# Altium PCB 400432.PcbDoc (part 6 of 7)
Units mm, origin at the board's own origin, x right, y up, seen from the top; angles counter-clockwise.
Board outline 136.53 x 63.5 mm, 4 copper layers (Top Layer, Mid-Layer 1, Mid-Layer 2, Bottom Layer), stack 1.505 mm thick; 354 components, 245 nets, 1470 pads, 1957 vias.
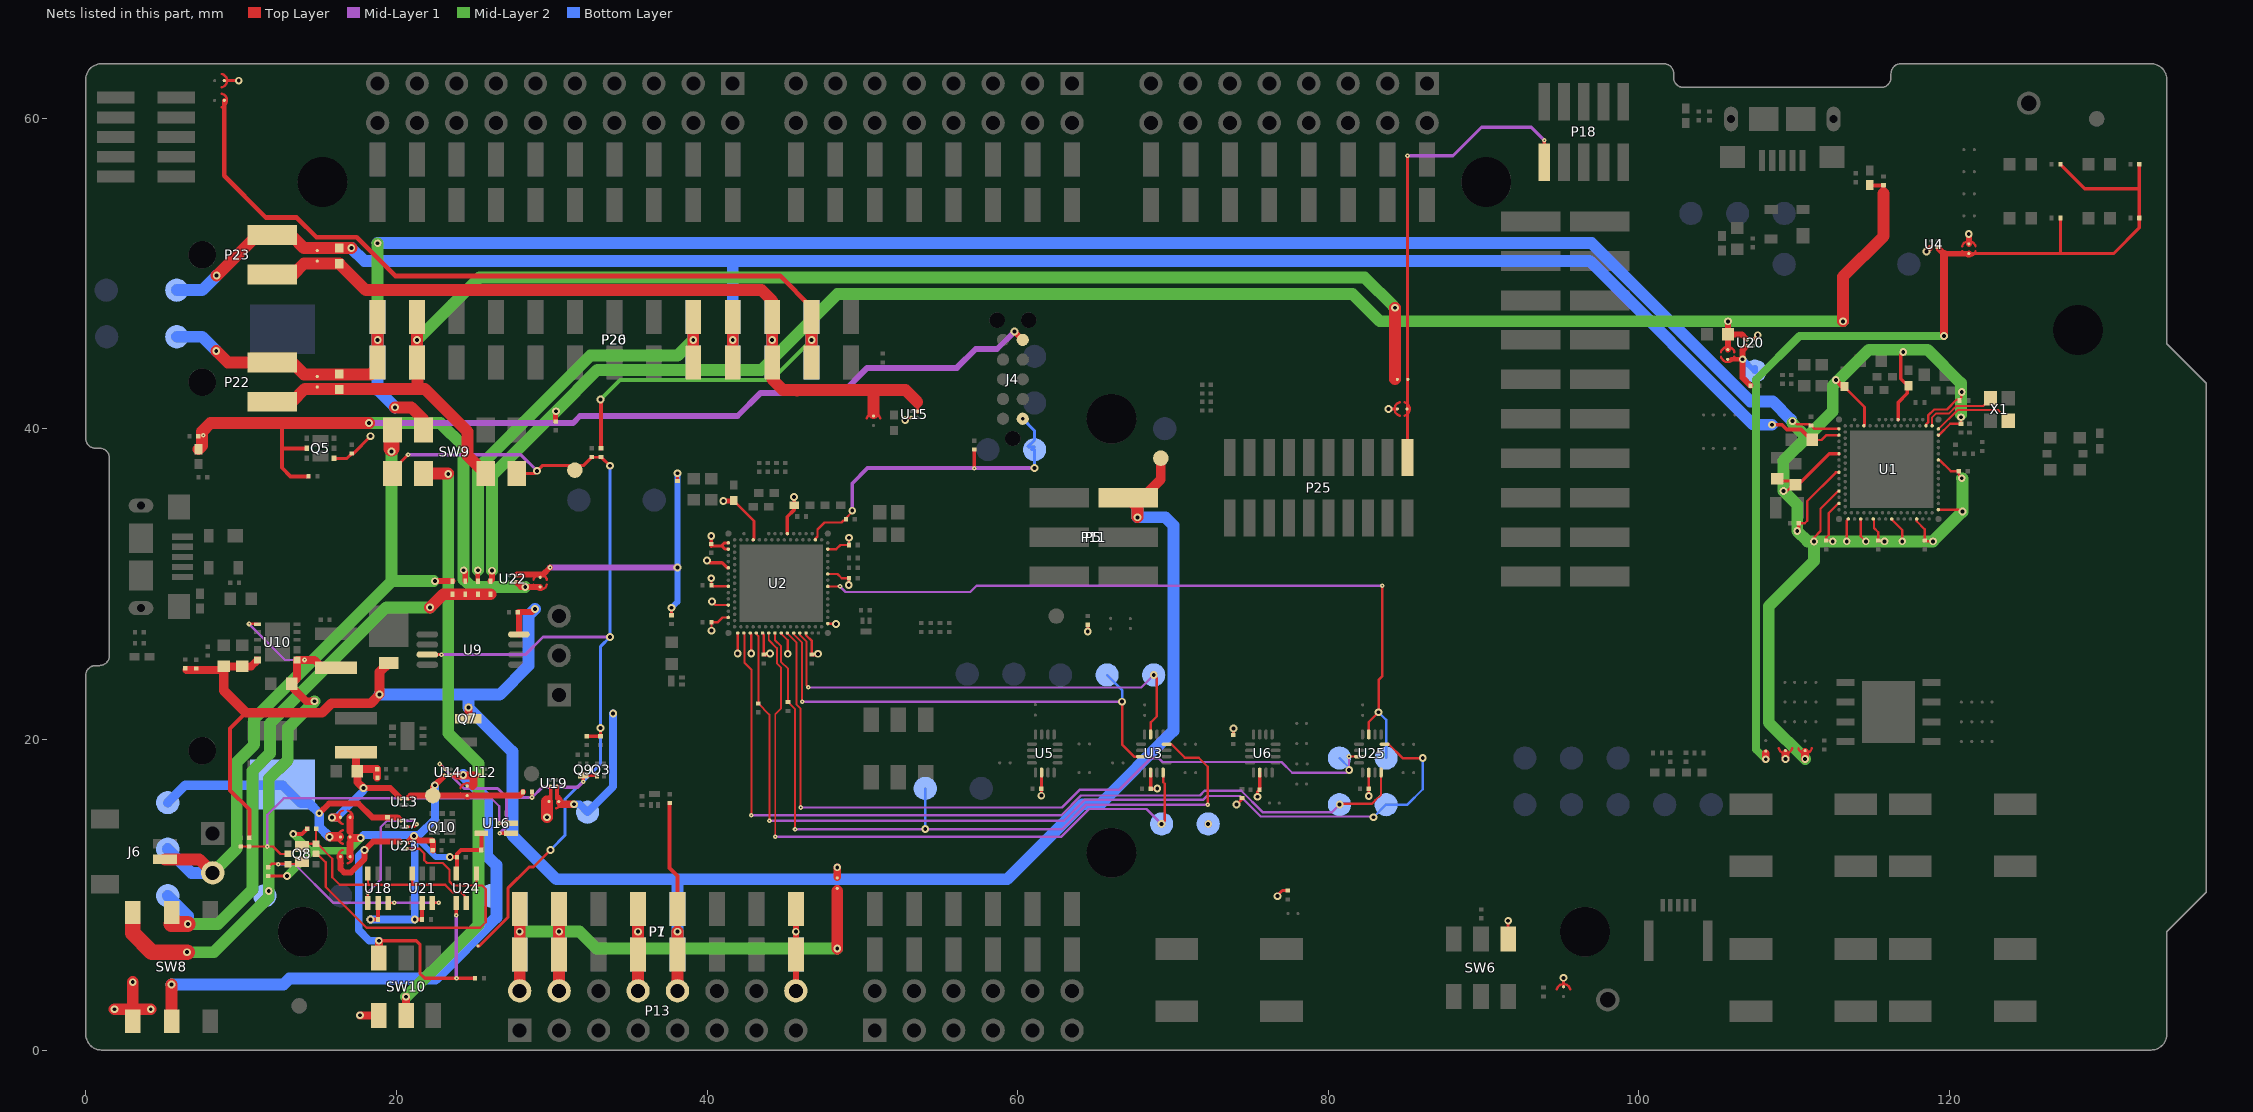
[diagram p7: the nets of this part, all layers, seen from the top]

## Via types
v1: diameter 0.5, hole 0.25, Top Layer to Bottom Layer, tented both sides, 1453 vias
v2: diameter 0.3, hole 0.1, Top Layer to Mid-Layer 1, tented top, 392 vias
v3: diameter 0.3, hole 0.1, Top Layer to Mid-Layer 1, tented both sides, 68 vias
v4: diameter 0.61, hole 0.305, Top Layer to Bottom Layer, tented both sides, 44 vias

## Nets (pads, with @x,y where several pads share a name; then routed paths per layer and width w, separated by ;. In a path a pad name is that pad's centre, name@x,y a point inside that pad or via, vN(x,y) a via of type N, cw(c..) or ccw(c..) an arc to the next point about the centre after c; other vN are vias at no path point) (continued)
V5V: C58.2 C59.2 C60.2 C65.2 D4.1 P1.5 P5.2 P7.5 P11.2 P13.10 Q7.2 R58.1 R59.2 R65.1 TP36.1 U9.8 U10.10 | length 143.5
  Top Layer w0.254: 10.312,21.717 9.296,20.701 9.296,16.713 10.538,15.472 R65.1@10.538,13.671 ; R58.1@37.592,15.895 37.592,11.709 38.1,11.201 v1(38.1,7.62)
  Top Layer w0.381: C65.2@27.856,28.194 28.727,28.194 v1(28.931,28.397) ; U9.8@27.893,26.756 C65.2@27.893,28.157
  Top Layer w0.508: C58.2@6.477,24.473 C60.2@8.663,24.473 ; C60.2@8.89,24.7 C59.2@10.084,24.7 10.66,24.7 U10.10@11.04,25.079 ; Q7.2@24.639,21.336 v1(24.639,22.046)
  Top Layer w0.635: C60.2@8.89,24.7 8.89,23.139 10.312,21.717 15.215,21.717 15.824,22.327 18.364,22.327 v1(18.923,22.885) 18.923,24.334 D4.1@19.507,24.918 ; P5.2@67.119,35.56 68.047,35.56 69.215,36.728 TP36.1@69.215,38.1
  Top Layer w0.762: P13.10@38.1,3.81 P1.5@38.1,6.155 v1(38.1,7.62) ; P5.2@67.119,35.56 67.722,34.957 v1(67.722,34.296)
  Bottom Layer w0.508: 21.857,22.948 21.92,22.885 ; 24.639,22.81 24.714,22.885
  Bottom Layer w0.762: v1(18.923,22.885) 21.92,22.885 24.714,22.885 26.645,22.885 28.499,24.74 28.499,27.965 v1(28.931,28.397) ; 24.639,22.81 v1(24.639,22.046) 27.47,19.215 27.47,13.83 30.302,10.998 38.1,10.998 ; P7.5@38.1,6.155 v1(38.1,7.62) P7.5@38.1,9.085 38.1,10.998 ; P11.2@67.722,35.56 v1(67.722,34.296) 69.514,34.296 70.028,33.782 70.028,20.549 65.303,15.824 64.16,15.824 59.334,10.998 38.1,10.998
VBAT: Bat1.1 R71.1 SB35.2 TP26.1 U17.A1 | length 19.3
  Top Layer w0.381: v1(15.037,15.24) 15.672,15.875 17.551,15.875 18.448,14.978 20.087,14.978 U17.A1@20.225,14.84
  Top Layer w0.61: v1(15.697,13.716) SB35.2@16.332,13.716
  Bottom Layer w0.61: TP26.1@5.283,15.932 6.402,17.05 12.675,17.05 13.85,15.875 14.402,15.875 v1(15.037,15.24) 15.037,14.376 v1(15.697,13.716)
VBAT_EN: U17.B2 U18.4 | length 8.5
  Top Layer w0.152: v2(18.161,10.135) 18.161,9.474 U18.4@18.171,9.464 ; U17.B2@20.698,14.367 21.149,14.367 v2(21.311,14.529)
  Mid-Layer 1 w0.152: v2(18.161,10.135) 18.999,10.973 18.999,14.351 19.406,14.757 21.082,14.757 v2(21.311,14.529)
VBOOST_SRC: C57.2 L7.2 SW8.6 TP28.1 U10.1 U10.6 | length 36.4
  Top Layer w0.152: v2(10.516,27.432) 11.056,27.432 U10.6@11.074,27.414
  Top Layer w0.508: v1(14.732,22.454) 14.199,22.454 13.273,23.379 C57.2@13.273,23.571 13.614,23.912 U10.1@13.614,25.114 v2(14.09,25.114) 14.739,25.114 15.291,24.562 L7.2@15.832,24.562
  Top Layer w1.016: 3.028,8.109 3.028,7.529 4.258,6.299 v1(6.518,6.299)
  Mid-Layer 1 w0.152: v2(10.516,27.432) 12.834,25.114 v2(14.09,25.114)
  Mid-Layer 2 w0.762: v1(6.518,6.299) 8.255,6.299 11.786,9.83 v1(11.786,10.236) 11.786,17.45 13.005,18.669 13.005,20.726 v1(14.732,22.454)
VBOOST_SRC': D3.1 D5.1 D6.1 D7.1 SW8.5 TP32.1 | length 37.3
  Top Layer w0.762: v1(22.173,28.5) 23.019,29.346 D6.1@23.622,29.346 D3.1@24.435,29.346 D7.1@25.248,29.346 D5.1@26.06,29.346
  Top Layer w1.016: 5.528,8.109 v1(6.576,8.109)
  Mid-Layer 2 w0.762: v1(6.576,8.109) 8.516,8.109 10.744,10.338 10.744,17.983 11.862,19.101 11.862,21.006 19.356,28.5 v1(22.173,28.5)
  Bottom Layer w0.762: TP32.1@5.283,9.931 6.576,8.639 v1(6.576,8.109)
VBUS: C50.2 D3.2 FB2.2 J4.5 Q5.2 R52.1 SB48.2 U22.A2 | length 85.1
  Top Layer w0.254: 12.675,40.361 12.624,40.31 12.624,38.735 ; Q5.2@14.168,38.735 12.624,38.735 ; R52.1@14.345,36.932 13.183,36.932 12.624,37.49 12.624,38.735
  Top Layer w0.381: v1(24.333,30.886) 24.435,30.785 D3.2@24.435,30.186 ; 27.788,30.062 27.774,30.062 28.024,29.812 v1(28.296,29.812) SB48.2@29.235,29.812 ; v1(59.792,46.253) J4.5@60.325,45.72
  Top Layer w0.762: FB2.2@7.264,38.677 7.493,38.905 7.493,39.821 8.032,40.361 12.675,40.361 v1(18.237,40.361)
  Mid-Layer 1 w0.381: v1(18.237,40.361) 31.369,40.361 31.826,40.818 41.961,40.818 43.434,42.291 48.692,42.291 50.317,43.917 56.083,43.917 57.302,45.136 58.674,45.136 v1(59.792,46.253)
  Mid-Layer 2 w0.762: v1(18.237,40.361) 22.835,40.361 24.333,38.862 v1(24.333,30.886) 24.333,30.302 24.823,29.812 v1(28.296,29.812)
  other v2: 7.569,39.573
VBUS_IMCU: R7.2 R10.1 SB48.1 U22.A1 | length 20.3
  Top Layer w0.203: R7.2@37.719,27.996 v1(37.719,28.473) ; R10.1@38.1,36.632 v1(38.1,37.135)
  Top Layer w0.381: U22.A1@27.762,30.604 29.179,30.604 29.342,30.604 29.435,30.604 v3(29.896,31.064)
  Mid-Layer 1 w0.381: v3(29.896,31.064) v1(38.1,31.064)
  Bottom Layer w0.381: v1(37.719,28.473) 38.1,28.854 v1(38.1,31.064) v1(38.1,37.135)
VBUS_NRF: R1.1 SB80.1 TP38.1 U20.A1 | length 4.9
  Top Layer w0.305: 105.943,44.468 106.068,44.468 v1@106.676,44.468
  Top Layer w0.381: U20.A1@106.909,45.288 106.676,45.056 v1(106.676,44.472) 106.676,44.468 106.676,43.28 R1.1@107.182,42.774
  Bottom Layer w0.381: v1(106.676,44.472) 107.434,43.713 TP38.1@107.467,43.713 TP38.1@107.467,43.909
VBUS_NRF': C48.2 C67.2 D5.2 FB1.2 R78.1 SB80.2 U20.A2 | length 113.8
  Top Layer w0.254: FB1.2@114.852,55.684 114.864,55.671 C48.2@115.748,55.671 115.748,55.143
  Top Layer w0.305: R78.1@30.251,40.513 v1@30.251,41.097
  Top Layer w0.381: D5.2@26.06,30.186 26.162,30.287 v1(26.162,30.861) ; SB80.2@105.715,45.093 105.729,45.107 105.729,45.237 105.729,45.267 C67.2@105.729,46.076 ; v1(105.74,46.914) 105.729,46.903 C67.2@105.729,46.076 ; U20.A2@106.896,45.809 106.64,46.065 105.74,46.065 C67.2@105.729,46.076
  Top Layer w0.762: v1(113.132,46.914) 113.132,49.784 115.748,52.4 115.748,55.143
  Mid-Layer 2 w0.762: v1(26.162,30.861) 26.162,37.008 30.251,41.097 32.944,43.79 43.51,43.79 48.387,48.666 81.559,48.666 83.312,46.914 v1(105.74,46.914) v1(113.132,46.914)
  other v1: 30.277,41.123
VCOM0_CTS: R9.1 TP55.1 U2.AL9 U25.4 | length 61.3
  Top Layer w0.125: U2.AL9@43.176,26.848 43.195,26.829 43.195,26.758 43.301,26.652 R9.1@43.301,22.311 44.018,21.593 v3(44.018,14.757)
  Top Layer w0.152: U25.4@83.629,19.691 83.89,19.691 84.785,18.796 v1(86.081,18.796)
  Mid-Layer 1 w0.152: v3(44.018,14.757) 62.967,14.757 64.313,16.104 71.933,16.104 72.187,16.358 74.33,16.358 75.651,15.037 82.855,15.037 v1(82.906,14.986)
  Bottom Layer w0.152: v1(82.906,14.986) TP55.1@83.718,15.799 85.09,15.799 86.081,16.789 v1(86.081,18.796)
VCOM0_RTS: TP54.1 U2.AL5 U25.16 | length 55.6
  Top Layer w0.125: U2.AL5@42.376,26.848 42.414,26.811 42.414,24.936 42.851,24.499 v3@42.851,15.114 ; 83.033,16.078 83.404,16.45 U25.16@83.404,17.866
  Top Layer w0.152: v1(80.732,15.799) 80.783,15.85 82.804,15.85 83.033,16.078 ; U25.16@83.404,17.866 U25.16@83.409,17.861
  Mid-Layer 1 w0.152: v3(42.85,15.113) 62.814,15.113 64.084,16.383 71.73,16.383 72.034,16.688 74.397,16.688 75.768,15.316 80.25,15.316 v1(80.732,15.799)
  Bottom Layer w0.152: TP54.1@80.718,15.799 v1(80.732,15.799)
VCOM0_RxD: TP57.1 U2.AL19 U25.11 | length 51.2
  Top Layer w0.125: U2.AL19@45.176,26.806 45.193,26.806 45.771,26.228 45.771,22.232 46.032,21.971 v3(46.032,15.614)
  Top Layer w0.15: U2.AL19@45.176,26.806 U2.AL19@45.176,26.848
  Top Layer w0.152: v2(81.331,18.898) 81.334,18.894 81.976,18.894 U25.11@81.979,18.891
  Mid-Layer 1 w0.152: v3(46.032,15.614) 62.408,15.614 62.858,15.614 64.008,16.764 66.548,16.764 68.58,18.796 69.063,18.796 69.317,18.542 76.987,18.542 77.673,17.856 81.166,17.856 v1(81.343,18.034) 81.331,18.034 v2(81.331,18.898)
  Bottom Layer w0.152: TP57.1@80.718,18.799 81.343,18.173 v1(81.343,18.034)
VCOM0_TxD: TP56.1 U2.U31 U25.7 | length 49.1
  Top Layer w0.125: U2.U31@47.795,29.829 U2.U31@47.776,29.848 v3(48.562,29.848)
  Top Layer w0.152: U25.7@82.604,20.316 82.604,21.111 v1(83.236,21.742) 83.236,23.825 83.464,24.054 v3(83.464,29.896)
  Mid-Layer 1 w0.152: v3(48.562,29.848) 48.92,29.489 56.947,29.489 57.353,29.896 v3(83.464,29.896)
  Bottom Layer w0.152: v1(83.236,21.742) 83.718,21.26 TP56.1@83.718,18.799
VCOM2_CTS: R13.1 TP1.1 U2.AL15 U3.4 | length 48.7
  Top Layer w0.125: U2.AL15@44.376,26.848 44.376,26.398 44.751,26.023 44.751,25.002 45.216,24.537 R13.1@45.216,22.398 45.669,21.945 v3(45.669,14.224)
  Top Layer w0.152: U3.4@69.597,19.685 U3.4@69.591,19.691 69.895,19.691 70.764,18.821 71.653,18.821 72.238,18.237 v3(72.238,15.799)
  Mid-Layer 1 w0.152: v3(45.669,14.224) v1(54.051,14.224) 62.865,14.224 64.44,15.799 v3(72.238,15.799)
  Bottom Layer w0.152: v1(54.051,14.224) TP1.1@54.051,16.84
VCOM2_RTS: TP3.1 U2.AL13 U3.16 | length 43
  Top Layer w0.125: U2.AL13@43.976,26.848 43.976,26.398 44.501,25.873 44.501,24.898 44.774,24.625 44.774,21.996 44.393,21.615 v3@44.393,13.741
  Top Layer w0.152: v1(69.266,14.554) 69.469,14.757 69.469,17.145 69.366,17.248 U3.16@69.366,17.866
  Mid-Layer 1 w0.152: v3@44.399,13.741 62.814,13.741 64.592,15.519 68.301,15.519 v1(69.266,14.554)
  other v3: 44.399,13.741
VCOM2_RxD: TP2.1 U2.AL21 U3.11 | length 31.6
  Top Layer w0.125: U2.AL21@45.576,26.824 45.576,26.777 45.627,26.727 46.126,26.227 v3(46.126,22.428)
  Top Layer w0.152: v1(66.726,22.428) 66.726,19.66 67.494,18.891 U3.11@67.941,18.891
  Mid-Layer 1 w0.152: v3(46.126,22.428) v1(66.726,22.428)
  Bottom Layer w0.152: TP2.1@65.758,24.144 66.726,23.176 v1(66.726,22.428)
VCOM2_TxD: TP4.1 U2.AL23 U3.7 | length 30.4
  Top Layer w0.125: U2.AL23@45.976,26.848 45.995,26.829 45.995,26.712 46.401,26.306 46.401,23.474 v3(46.528,23.347)
  Top Layer w0.152: U3.7@68.566,20.316 68.58,20.33 68.58,21.107 68.961,21.488 68.961,23.927 v1@68.758,24.13
  Mid-Layer 1 w0.152: v3(46.528,23.347) 46.533,23.343 67.956,23.343 v1(68.758,24.144)
  Bottom Layer w0.152: TP4.1@68.758,24.13 v1(68.758,24.144)
VDBG: P18.1 P25.1 SB59.1 SB60.1 | length 30.8
  Top Layer w0.203: P25.1@85.09,38.145 85.098,38.153 v2(85.098,57.574) ; P18.1@93.904,57.156 v2(93.904,58.572)
  Mid-Layer 1 w0.203: v2(85.098,57.574) 88.029,57.574 89.865,59.411 93.066,59.411 v2(93.904,58.572)
VDD: C24.2 C41.2 C42.2 C45.2 Q5.4 R47.2 R48.1 R49.1 R51.1 R57.2 SB9.1 SB17.1 SB31.1 SB37.2 SB38.2 SB47.1 SB59.2 SW6.6 SW8.3 SW10.6 TP37.1 U3.14 U4.A2 U5.14 U6.14 U15.B2 U19.A2 U20.B2 U25.14 | length 24.6
  Top Layer w0.152: v1(82.601,16.358) 82.606,16.363 C24.2@82.606,16.815 82.606,17.864 U25.14@82.604,17.866
  Top Layer w0.2: SB47.1@8.923,62.408 v1(9.855,62.408) ; Q5.4@16.058,38.085 16.805,38.085 R51.1@17.12,38.399 17.216,38.399 v1(18.339,39.522) ; v1(61.524,16.377) C42.2@61.524,16.815 61.547,16.838 U5.14@61.547,17.866 ; v1(64.516,26.949) R57.2@64.516,27.376 ; U3.14@68.566,17.866 68.566,16.817 C41.2@68.569,16.815 68.986,16.815 v1(68.986,16.84) ; R48.1@73.889,20.275 v1(73.889,20.701) ; v1(74.092,15.799) 74.447,16.154 R49.1@74.447,16.225 ; v1(75.435,16.31) 75.435,16.614 75.585,16.764 U6.14@75.585,17.866 ; v1(83.871,41.275) SB59.2@84.442,41.275 ; SB31.1@95.148,4.072 v1(95.148,4.648)
  Top Layer w0.203: v1(52.756,40.564) 52.911,40.719 U15.B2@53.14,40.719 ; v1@76.733,9.957 77.044,10.267 R47.2@77.394,10.267 ; SW6.6@91.579,7.14 v1(91.579,8.319) ; U20.B2@107.363,45.742 v1(107.645,46.025)
  Top Layer w0.254: 29.941,15.992 U19.A2@29.941,16.95
  Top Layer w0.381: v1(118.516,51.41) U4.A2@118.732,51.625 ; SB9.1@121.234,51.9 v1(121.234,52.529)
  Top Layer w0.508: v1(17.653,2.235) 17.674,2.214 SW10.6@18.875,2.214 ; SB38.2@48.387,11.125 v1(48.387,11.76) ; v1(109.431,18.738) 109.431,19.096
  Top Layer w0.762: v1(1.848,2.628) v1(4.185,2.628) ; SW8.3@3.027,2.559 v1(3.027,4.369) ; 29.679,15.992 29.693,15.979 v1(29.693,14.986)
  Bottom Layer w0.508: v1(72.263,14.554) TP37.1@72.266,14.554
  other v1: 76.733,9.906
VDD_HV: C20.1 P20.10 P23.1 P26.10 R67.2 SB41.1 TP25.1 U1.E1 | length 125.2
  Top Layer w0.158: C20.1@111.369,39.272 111.761,39.272 ; C20.1@111.369,39.272 111.353,39.289 C20.1@111.369,39.272 ; C20.1@111.369,39.272 111.761,39.272 ; 111.761,39.272 112.078,39.589 ; 111.761,39.272 112.078,39.589 ; 112.078,39.589 U1.E1@112.878,39.589 112.078,39.589
  Top Layer w0.25: v1(108.56,40.259) 109.195,40.259 109.515,39.939 110.429,39.939 111.079,39.289 111.353,39.289 C20.1@111.308,39.289
  Top Layer w0.762: v1(8.43,49.86) 10.97,52.4 13.284,52.4 14.054,51.63 R67.2@16.332,51.63 v1(17.102,51.63) ; P20.10@41.656,44.255 v1(41.656,45.72) P20.10@41.656,47.185
  Bottom Layer w0.762: TP25.1@5.867,48.923 7.493,48.923 v1(8.43,49.86) ; v1(17.102,51.63) 17.932,50.8 41.656,50.8 ; P26.10@41.656,44.255 v1(41.656,45.72) P26.10@41.656,47.185 41.656,50.8 ; v1(108.56,40.259) 107.366,40.259 96.825,50.8 41.656,50.8
VDD_HV': P20.11 P23.2 P26.11 R67.1 SB41.2 SB81.1 U15.A1 | length 53.8
  Top Layer w0.254: U15.A1@53.54,41.119 53.54,41.729
  Top Layer w0.762: P23.2@11.811,49.86 13.284,49.86 14.064,50.64 16.322,50.64 R67.1@16.332,50.63 18.042,48.92 43.51,48.92 44.196,48.235 P20.11@44.196,47.185 v1(44.196,45.72) P20.11@44.196,44.255 44.196,43.18 44.882,42.494 45.771,42.494 ; 45.796,42.469 45.771,42.494 ; 50.724,41 50.724,42.494 ; 53.54,41.729 52.775,42.494 50.724,42.494 ; 45.771,42.494 50.724,42.494
  Bottom Layer w0.762: P26.11@44.196,44.255 v1(44.196,45.72) P26.11@44.196,47.185
VDD_IMCU: C25.1 C30.1 C31.1 C32.1 C33.1 C34.1 C35.1 C36.1 C37.1 C38.2 J4.1 R6.2 SB37.1 TP20.1 TP35.1 U2.A19 U2.AC1 U2.AG1 U2.AJ31 U2.AL3 U2.AL7 U2.AL11 U2.AL17 U2.AL25 U2.B8 U2.B28 U2.C1 U2.E1 U2.E31 U2.L1 U2.N31 U2.U1 U19.A1 | length 59.5
  Top Layer w0.15: v1(40.284,27) 40.284,27.532 40.301,27.548 40.701,27.548 41.001,27.848 U2.AG1@41.376,27.848 ; C35.1@40.286,29.848 U2.U1@41.376,29.848 ; C35.1@40.286,29.923 v1@40.286,30.373 ; v1(40.326,28.877) 40.555,28.648 U2.AC1@41.376,28.648 ; v1(41.974,25.533) U2.AL3@41.976,26.848 ; U2.AL7@42.776,26.848 42.851,26.773 v1(42.851,25.533) ; U2.AL11@43.576,26.848 43.576,26.828 43.653,26.751 C37.1@43.653,25.458 ; C37.1@43.653,25.408 v1@44.001,25.408 ; U2.AL17@44.776,26.806 45.201,26.381 v1(45.201,25.508) ; U2.AL25@46.376,26.848 46.376,26.702 46.751,26.327 C30.1@46.751,25.458 46.801,25.408 v1@47.151,25.408 ; U2.B28@46.976,32.848 46.976,32.923 47.113,33.061 47.113,33.505 47.569,33.961 48.664,33.961 48.792,34.09 48.881,34.09 48.912,34.12 48.912,34.209 49.351,34.648 v1(49.351,34.723) ; U2.AJ31@47.776,27.448 v1@48.094,27.448 ; U2.N31@47.776,30.648 48.401,30.648 48.673,30.376 49.138,30.376 C31.1@49.141,30.373 49.124,30.356 v1(49.124,29.947)
  Top Layer w0.152: U2.E31@47.776,32.248 48.326,32.248 48.59,32.512 C32.1@49.141,32.512 v1(49.141,32.977)
  Top Layer w0.187: C38.2@41.826,35.428 41.826,35.256 43.019,34.063 43.019,32.891 U2.B8@42.976,32.848
  Top Layer w0.2: v1(40.001,31.523) 40.151,31.373 40.974,31.373 41.299,31.048 U2.L1@41.376,31.048 ; C34.1@40.276,32.458 40.886,32.458 ; U2.E1@41.376,32.248 41.371,32.253 41.146,32.253 40.939,32.461 41.126,32.648 U2.C1@41.376,32.648 ; v1@47.151,25.427 v1(47.151,25.508)
  Top Layer w0.203: v1(48.311,27.432) v1@48.393,27.514 ; v2(57.201,37.465) R6.2@57.201,38.653
  Top Layer w0.225: U2.A19@45.176,33.248 45.176,34.343 45.601,34.768 v1(45.601,35.598)
  Top Layer w0.25: C34.1@40.276,32.458 v1(40.276,33.086)
  Top Layer w0.254: 30.347,16.196 30.347,16.407 U19.A1@30.347,16.958
  Top Layer w0.3: v1(41.051,35.348) C38.2@41.676,35.348
  Top Layer w0.508: SB37.1@30.531,15.926 30.605,15.844 30.625,15.824 v1(31.445,15.824)
  Mid-Layer 1 w0.203: v1@61.081,37.459 v1(61.087,37.465)
  Mid-Layer 1 w0.254: v1(49.351,34.723) 49.351,36.473 50.343,37.465 v2(57.201,37.465) v1(61.087,37.465)
  Bottom Layer w0.203: v1(60.325,40.64) 61.087,39.878 61.087,39.268 60.681,38.862 60.712,38.831 61.087,38.831 60.912,38.656 TP20.1@61.087,38.656 v1(61.087,37.465)
  Bottom Layer w0.508: v1(31.445,15.824) 31.801,15.824 TP35.1@32.309,15.316 33.96,16.967 v1(33.96,21.666)
  other v1: 44.051,25.533 40.276,30.373
VDD_NRF: C2.1 C8.1 C9.1 C10.1 C11.1 C12.1 C13.1 C14.1 C15.1 C16.2 C19.1 L4.1 P20.1 P22.1 P26.1 R64.2 SB18.1 SB40.1 SW9.6 TP24.1 U1.A19 U1.AC1 U1.AG1 U1.AJ31 U1.AL3 U1.AL7 U1.AL11 U1.AL17 U1.AL25 U1.B8 U1.B28 U1.C1 U1.E31 U1.L1 U1.N31 U1.U1 | length 233.2
  Top Layer w0.15: v1(109.88,40.488) 109.954,40.488 110.157,40.284 110.998,40.284 111.294,39.989 111.778,39.989 U1.C1@112.878,39.989 ; C13.1@110.288,33.914 110.673,33.914 110.828,34.069 110.828,35.339 112.678,37.189 U1.U1@112.878,37.189 ; v1(111.26,32.735) 111.26,32.977 111.69,33.407 111.69,34.843 112.836,35.989 U1.AC1@112.878,35.989 ; C14.1@112.051,32.799 112.051,33.007 112.215,33.171 112.215,34.579 112.825,35.189 U1.AG1@112.878,35.189 ; C14.1@112.128,32.799 112.426,32.799 v1(112.476,32.749) ; v1(113.376,32.749) 113.376,34.087 U1.AL3@113.478,34.189 ; U1.AL7@114.278,34.189 114.278,33.077 v1(114.606,32.749) ; U1.AL11@115.078,34.189 115.128,34.139 115.128,33.614 115.404,33.338 C15.1@115.404,32.799 ; C15.1@115.404,32.749 v1(115.803,32.749) ; U1.AL17@116.278,34.147 116.953,33.472 v1(116.953,32.749) ; U1.AL25@117.878,34.189 117.878,34.043 118.403,33.518 C8.1@118.403,32.799 118.453,32.749 v1(118.928,32.749) ; U1.B28@118.478,40.189 118.478,40.264 118.615,40.401 118.615,40.846 119.008,41.239 119.827,41.239 120.452,41.864 120.643,41.864 120.753,41.974 v1@120.753,42.364 ; U1.AJ31@119.278,34.789 120.718,34.789 v1(120.828,34.679) ; U1.E31@119.278,39.589 119.32,39.589 120.045,40.314 120.718,40.314 C10.1@120.728,40.324 v1@120.728,40.789 ; 120.593,37.024 C9.1@120.593,37.264 ; U1.N31@119.355,37.989 120.08,37.264 ; U1.N31@119.355,37.989 119.278,37.989 U1.N31@119.355,37.989 ; U1.N31@119.355,37.989 120.08,37.264 ; 120.08,37.264 C9.1@120.593,37.264 ; 120.08,37.264 C9.1@120.593,37.264
  Top Layer w0.187: C16.2@113.328,42.714 113.328,42.597 114.521,41.404 114.521,40.232 U1.B8@114.478,40.189
  Top Layer w0.2: L4.1@108.678,36.639 C19.1@110.078,36.639 ; v1(109.303,35.989) 109.527,35.989 109.927,36.389 C19.1@110.078,36.389 110.252,36.389 112.252,38.389 U1.L1@112.878,38.389
  Top Layer w0.203: v1(110.188,33.414) 110.288,33.514 C13.1@110.288,33.914
  Top Layer w0.225: U1.A19@116.678,40.589 116.678,41.684 117.278,42.284 C2.1@117.278,42.739 ; v1@117.015,44.914 116.865,44.764 116.865,43.226 C2.1@117.353,42.739
  Top Layer w0.25: C16.2@113.19,42.781 C16.2@113.203,42.769
  Top Layer w0.305: v1@112.751,43.053 113.09,42.714 C16.2@113.228,42.714
  Top Layer w0.508: v1(110.701,18.738) 110.701,19.096 SB18.1@110.701,19.177
  Top Layer w0.762: v1(8.407,45.009) 9.146,44.27 P22.1@12,44.27 13.284,44.27 14.064,43.49 18.344,43.49 18.796,43.942 P20.1@18.796,44.255 v1(18.796,45.72) P20.1@18.796,47.185 ; v1(19.914,41.377) 20.955,41.377 21.749,40.583 SW9.6@21.749,39.906
  Mid-Layer 2 w0.762: v1(18.796,45.72) v1(18.796,51.943) ; v1@109.303,35.992 109.303,37.939 110.928,39.564 ; v1@109.323,35.968 110.188,35.104 v1(110.188,33.414) 110.853,32.749 v1(112.476,32.749) v1(113.376,32.749) v1(114.606,32.749) v1(115.803,32.749) v1(116.953,32.749) v1(118.928,32.749) 120.828,34.649 v1(120.828,34.679) 120.828,36.789 v1@120.803,36.814 ; v1@109.88,40.361 110.677,39.564 110.928,39.564 ; v1(110.701,18.738) 108.356,21.082 108.356,28.575 111.26,31.479 v1(111.26,32.735) ; v1@120.728,40.894 120.728,42.939 118.581,45.085 114.808,45.085 112.478,42.755 112.478,41.114 110.928,39.564
  Bottom Layer w0.762: TP24.1@5.867,45.923 7.493,45.923 v1(8.407,45.009) ; P26.1@18.796,47.185 v1(18.796,45.72) P26.1@18.796,44.255 18.796,42.494 v1(19.914,41.377) ; v1@18.796,51.956 96.965,51.956 107.163,41.758 108.61,41.758 v1@109.779,40.589
  other v1: 120.777,36.814 120.728,40.738 120.778,42.364 112.674,43.129 117.015,44.939
VDD_NRF': P20.2 P22.2 P26.2 R64.1 SB40.2 SB60.2 SW9.3 | length 94.9
  Top Layer w0.762: P22.2@11.811,41.73 P22.2@12,41.73 13.284,41.73 14.115,42.561 21.361,42.561 ; P20.2@21.336,47.185 v1(21.336,45.72) P20.2@21.336,44.255 21.361,44.23 21.361,42.561 ; SW9.3@25.749,37.106 24.587,38.268 24.587,39.802 21.828,42.561 21.361,42.561 ; 84.295,43.18 v1(84.295,47.785)
  Mid-Layer 2 w0.762: v1(21.336,45.72) 25.349,49.733 82.347,49.733 v1@84.201,47.879
  Bottom Layer w0.762: P26.2@21.336,44.255 v1(21.336,45.72) P26.2@21.336,47.185
VDD_NRF_SENSE: R8.1 R12.1 R70.1 R77.1 SB58.1 SW9.1 SW9.4 TP33.1 U9.3 | length 65.4
  Top Layer w0.152: R70.1@32.54,38.122 R70.1@32.588,38.171 R77.1@33.172,38.171
  Top Layer w0.203: SW9.1@19.749,37.106 19.749,37.326 v2(20.752,38.329) ; U9.3@21.993,25.456 v3(22.906,25.456) ; SB58.1@25.255,6.706 25.356,6.706 27.178,8.528 27.178,10.408 28.553,11.782 28.826,11.782 v1(29.921,12.878) ; SW9.4@27.749,37.106 28.877,37.106 v1(29.058,37.287) 29.413,37.643 32.06,37.643 R70.1@32.54,38.122 ; R8.1@32.258,20.199 R12.1@33.147,20.199 v1(33.147,20.726) ; R77.1@33.172,38.171 33.203,38.171 v1(33.757,37.617)
  Mid-Layer 1 w0.203: v2(20.752,38.329) 28.016,38.329 v1(29.058,37.287) ; v3(22.906,25.456) 28.301,25.456 29.439,26.594 v1(33.757,26.594)
  Bottom Layer w0.203: v1(29.921,12.878) 30.861,13.818 30.861,16.154 33.147,18.44 v1(33.147,20.726) 33.147,25.984 v1(33.757,26.594) v1(33.757,37.617)
VDD_PER: R2.2 R3.2 R4.2 R5.2 SB9.2 SB16.1 U4.A1 | length 69.5
  Top Layer w0.203: SB9.2@121.234,51.275 121.587,51.275 127.127,51.275 ; R4.2@127.128,53.562 127.128,51.276 127.127,51.275 ; R2.2@127.128,57.016 128.696,55.448 132.207,55.448 132.208,55.447 ; R3.2@132.208,57.016 132.208,55.447 ; 127.127,51.275 130.548,51.275 132.208,52.935 R5.2@132.208,53.562 132.208,55.447
  Top Layer w0.381: U4.A1@119.266,51.625 119.629,51.262 120.891,51.262 121.221,51.262 SB9.2@121.234,51.275 ; v1@119.629,45.979 v1(119.634,45.974)
  Top Layer w0.508: v1(108.161,18.72) 108.161,19.079 ; v1@119.629,45.979 119.629,51.262
  Mid-Layer 2 w0.508: v1(108.161,18.72) 107.544,19.337 107.544,43.18 110.338,45.974 v1(119.634,45.974)
VEXT: R73.1 SB36.2 SW10.3 U23.A1 U24.1 | length 27.4
  Top Layer w0.203: v1(18.872,7.036) 21.285,7.036 21.514,6.807 21.514,4.928 21.819,4.623 v2(23.876,4.623) R73.1@25.064,4.623 ; SW10.3@18.875,5.914 SW10.3@18.875,6.251 ; v2(23.861,8.676) U24.1@23.861,9.464
  Top Layer w0.381: SB36.2@16.403,12.446 16.403,12.093 16.403,11.664 16.637,11.43 17.069,11.43 17.958,12.319 v1(17.958,12.878) 18.504,13.424 U23.A1@20.231,13.424
  Top Layer w0.508: v1(18.872,7.036) 18.872,5.917 SW10.3@18.875,5.914
  Mid-Layer 1 w0.203: v2(23.861,8.676) 23.861,4.638 v2(23.876,4.623)
  Bottom Layer w0.508: v1(17.958,12.878) 17.577,12.497 17.577,7.722 18.263,7.036 v1(18.872,7.036)
VEXT_EN: Q8.5 U23.B2 U24.4 | length 23.7
  Top Layer w0.152: Q8.5@14.864,12.624 14.91,12.624 15.443,12.09 15.443,10.516 18.085,7.874 25.4,7.874 25.756,8.23 25.756,10.363 25.527,10.592 25.171,10.592 ; U23.B2@20.698,12.957 21.485,12.957 21.793,12.649 21.793,12.217 21.971,12.039 22.988,12.039 23.419,11.608 23.419,10.846 23.673,10.592 25.171,10.592 ; U24.4@25.161,11.364 25.161,10.602 25.171,10.592
VEXT_EN_INV: Q8.3 R74.2 U18.6 U21.6 | length 14.6
  Top Layer w0.152: R74.2@11.76,11.766 11.775,11.766 11.834,11.825 11.834,11.84 11.975,11.981 12.962,11.981 Q8.3@12.969,11.974 ; Q8.3@12.974,11.974 13.744,11.974 Q8.3@13.919,12.149 ; Q8.3@13.955,11.974 Q8.3@13.995,12.014 ; U18.6@19.471,9.464 19.853,9.464 v2(19.863,9.474) ; U21.6@22.316,9.464 22.326,9.474 v2(22.733,9.474)
  Mid-Layer 1 w0.152: v2(12.395,11.963) 13.462,11.963 15.951,9.474 v2(19.863,9.474) v2(22.733,9.474)
VIN: P1.8 P7.8 P13.16 | length 8.2
  Top Layer w0.381: P13.16@45.72,3.81 P1.8@45.72,6.155 v1(45.72,7.62) P1.8@45.72,9.085
  Bottom Layer w0.381: P7.8@45.72,6.155 v1(45.72,7.62) P7.8@45.72,9.085
VIN3-5V: D7.2 P20.9 P26.9 | length 30.4
  Top Layer w0.305: D7.2@25.248,30.186 v1(25.248,30.886)
  Top Layer w0.762: P20.9@39.116,44.255 v1(39.116,45.72) P20.9@39.116,47.185
  Mid-Layer 2 w0.762: v1(25.248,30.886) 25.248,37.465 32.487,44.704 38.1,44.704 v1(39.116,45.72)
  Bottom Layer w0.762: P26.9@39.116,44.255 v1(39.116,45.72) P26.9@39.116,47.185
VIO: P1.1 P1.2 P1.4 P7.1 P7.2 P7.4 P13.2 P13.4 P13.8 SB38.1 | length 50.3
  Top Layer w0.762: P13.2@27.94,3.81 P1.1@27.94,6.155 P1.1@27.94,9.085 ; P13.4@30.48,3.81 v1(30.48,7.62) P1.2@30.48,9.085 ; P13.8@35.56,3.81 P1.4@35.56,6.155 P1.4@35.56,9.085 ; v1(48.387,6.528) 48.387,10.236
  Mid-Layer 2 w0.762: v1(27.94,7.62) v1(30.48,7.62) 31.801,7.62 32.893,6.528 35.56,6.528 ; v1(35.56,7.62) 35.56,6.528 ; v1(48.387,6.528) 35.56,6.528
  Bottom Layer w0.762: P7.1@27.94,6.155 P7.1@27.94,9.085 ; P7.2@30.48,6.155 P7.2@30.48,9.085 ; P7.4@35.56,6.155 P7.4@35.56,9.085
VIO_REF: P20.12 P26.12 R77.2 SB19.1 | length 71
  Top Layer w0.254: v1(33.147,41.885) 33.172,41.859 R77.2@33.172,38.741
  Top Layer w0.305: SB19.1@8.923,61.138 8.923,60.785 8.923,56.279 11.608,53.594 13.589,53.594 14.859,52.324 17.45,52.324 19.939,49.835 44.704,49.835 46.736,47.803 P20.12@46.736,47.185
  Top Layer w0.762: P20.12@46.736,44.255 v1(46.736,45.72) P20.12@46.736,47.185
  Mid-Layer 2 w0.254: v1(33.147,41.885) 34.392,43.129 44.145,43.129 v1(46.736,45.72)
  Bottom Layer w0.762: P26.12@46.736,44.255 v1(46.736,45.72) P26.12@46.736,47.185
VLI-ION: D6.2 J6.2 P27.2 SW9.5 TP31.1 | length 43.9
  Top Layer w0.381: v1(22.494,30.186) D6.2@23.622,30.186
  Top Layer w0.762: J6.2@5.105,12.276 7.307,12.276 P27.2@8.179,11.405
  Top Layer w1.016: v1@19.685,38.735 19.685,39.842 SW9.5@19.749,39.906
  Mid-Layer 2 w0.762: P27.2@8.179,11.405 9.728,12.954 9.728,18.542 10.846,19.66 10.846,21.321 19.71,30.186 ; v1(19.685,38.532) 19.685,30.211 19.71,30.186 ; v1@22.403,30.186 19.71,30.186
  Bottom Layer w0.762: TP31.1@5.283,12.932 6.81,11.405 P27.2@8.179,11.405
VREG: C62.2 C63.2 L6.2 R60.2 SB34.2 U13.A1 | length 10.2
  Top Layer w0.381: v1(17.882,16.866) 19.609,16.866 U13.A1@20.231,16.243
  Top Layer w0.508: v1(15.85,14.961) 16.228,14.961 16.23,14.959 ; L6.2@17.399,19.093 17.399,18.049 C63.2@17.49,17.958 ; v1(17.882,16.866) 17.49,17.257 C63.2@17.49,17.958 ; C62.2@18.765,17.551 R60.2@18.765,18.085 17.617,18.085 C63.2@17.49,17.958
  Bottom Layer w0.508: v1(15.85,14.961) 16.144,14.961 17.882,16.699 v1(17.882,16.866)
VREG_EN: Q8.2 R65.2 R66.1 U16.2 | length 22.6
  Top Layer w0.152: R66.1@10.004,13.101 R65.2@10.538,13.101 v2(11.684,13.101) 12.064,13.101 12.541,12.624 Q8.2@12.969,12.624 ; v2(26.619,14.605) U16.2@27.366,14.605
  Mid-Layer 1 w0.152: v2(11.684,13.101) 11.684,15.138 12.757,16.212 26.105,16.212 26.619,15.697 v2(26.619,14.605)
VREG_EN_INV: Q8.6 R68.2 U18.3 U21.3 U24.2 | length 15.2
  Top Layer w0.152: Q8.6@13.919,13.099 14.094,13.274 Q8.6@14.824,13.274 ; R68.2@14.839,14.249 14.824,14.234 Q8.6@14.824,13.274 ; Q8.6@14.851,13.292 14.902,13.292 15.875,12.319 15.875,11.125 16.358,10.643 18.171,10.643 ; Q8.6@14.864,13.274 Q8.6@14.824,13.274 ; U18.3@18.171,11.364 18.171,10.643 ; U21.3@21.016,11.364 21.016,10.643 ; U24.2@24.511,9.804 24.155,10.16 23.622,10.16 23.139,10.643 21.016,10.643 ; 18.171,10.643 21.016,10.643
VSENSE_SW_OUT: SB39.1 SW8.2 TP30.1 U12.A2 U14.A1 | length 36.9
  Top Layer w0.25: U14.A1@23.517,17.682 23.876,17.682 ; 24.971,17.682 U12.A2@25.378,17.682
  Top Layer w0.508: 23.876,17.682 24.971,17.682 24.971,17.08 24.892,17
  Top Layer w0.762: 5.528,2.609 v1(5.528,4.216)
  Bottom Layer w0.762: v1(5.528,4.216) 12.727,4.216 13.106,4.596 22.503,4.596 26.441,8.534 26.441,11.909 25.829,12.521 25.829,16.182 v1(24.308,17.704)
VSRC_NRF: SW9.2 SW10.5 | length 39.2
  Top Layer w0.508: SW10.5@20.625,2.214 v1(20.625,3.429)
  Top Layer w0.635: v1@23.32,37.106 v1(23.343,37.084)
  Top Layer w0.762: SW9.2@21.749,37.106 v1@23.32,37.106
  Mid-Layer 2 w0.762: v1(20.625,3.429) 22.174,4.978 22.225,4.978 25.298,8.052 25.298,18.44 23.343,20.396 v1(23.343,37.084)
VSUPPLY: C68.2 C69.2 C70.2 C71.2 Q10.4 R68.1 R69.1 R72.1 R74.1 SB34.1 SB35.1 SB36.1 SB39.2 TP29.1 U13.A2 U14.A2 U16.5 U18.5 U21.5 U23.A2 U24.5 | length 49.8
  Top Layer w0.203: R74.1@11.76,11.196 12.948,11.196 v1(12.954,11.201)
  Top Layer w0.254: v1(13.36,13.919) 13.939,13.919 R68.1@14.269,14.249 ; v1(18.339,8.407) C68.2@18.816,8.407 18.816,9.458 U18.5@18.821,9.464 ; v1(21.184,8.407) C71.2@21.661,8.407 21.661,9.458 U21.5@21.666,9.464 ; v1(23.444,12.421) C69.2@23.896,12.421 ; U24.5@23.861,11.364 23.896,11.399 C69.2@23.896,12.421 ; U16.5@25.466,13.955 25.471,13.95 C70.2@25.471,12.878 24.154,12.878 23.896,12.62 C69.2@23.896,12.421
  Top Layer w0.381: U23.A2@20.764,13.424 v1(21.128,13.787) 21.434,13.481 Q10.4@22.301,13.481 22.346,13.436 R72.1@22.346,12.852 ; U13.A2@20.777,16.256 20.912,16.391 22.352,16.391 22.352,16.916 v1(22.479,17.043) U14.A2@23.038,17.602 ; TP29.1@22.352,16.383 22.352,16.386 27.937,16.386 R69.1@28.163,16.612
  Top Layer w0.457: SB36.1@17.028,12.446 17.028,12.799 17.028,13.365 ; 17.028,14.067 SB34.1@17.028,14.986
  Top Layer w0.508: SB35.1@17.091,13.65 17.195,13.65 v1(17.704,13.65)
  Mid-Layer 2 w0.508: v1(12.954,11.201) 14.58,12.827 ; v1(13.36,13.919) 14.453,12.827 14.58,12.827 ; v1(17.704,13.65) 16.881,12.827 14.58,12.827
  Bottom Layer w0.381: v1@21.184,13.787 22.55,12.421 v1(23.444,12.421)
  Bottom Layer w0.508: v1(17.704,13.65) 17.897,13.843 v1@21.128,13.843 ; v1(18.339,8.407) v1(21.184,8.407) 21.184,13.787 v1@21.128,13.843 ; v1(22.479,17.043) 22.479,14.859 21.463,13.843 v1@21.128,13.843
VSUPPLY_EN: Q3.1 Q9.3 R69.2 U14.B2 U16.1 | length 15.9
  Top Layer w0.152: v2(22.784,18.415) U14.B2@23.117,18.082
  Top Layer w0.203: v2(26.66,13.955) U16.1@27.366,13.955 ; v2(28.733,16.262) R69.2@28.733,16.612 ; v3(32.029,17.272) Q9.3@32.029,17.684 Q3.1@32.922,17.684
  Mid-Layer 1 w0.203: v2(22.784,18.415) 24.359,16.84 26.518,16.84 27.096,16.262 ; v2(26.66,13.955) 27.102,14.397 27.102,16.256 27.096,16.262 ; v3(32.029,17.272) 31.674,16.916 29.388,16.916 v2(28.733,16.262) 27.096,16.262
XC1: U1.C31 X1.1 | length 7
  Top Layer w0.125: X1.1@123.778,40.518 123.778,40.56 123.139,41.199 120.512,41.199 120.486,41.173 ; U1.C31@119.302,39.989 120.486,41.173 ; U1.C31@119.302,39.989 U1.C31@119.278,39.989 U1.C31@119.302,39.989 ; U1.C31@119.302,39.989 120.486,41.173
XC2: U1.B30 X1.3 | length 6.4
  Top Layer w0.125: U1.B30@118.878,40.189 118.878,40.737 ; 120.252,41.292 119.936,40.976 ; X1.3@122.628,41.968 122.628,41.932 122.149,41.453 120.412,41.453 119.936,40.976 ; 118.878,40.737 119.117,40.976 ; 118.878,40.737 119.117,40.976 ; 119.117,40.976 119.936,40.976 ; 119.117,40.976 119.936,40.976
pads on no net: Fid1.0 Fid2.0 J2.4 J2.6@3.557,28.45 J2.6@3.557,35.05 J3.4 J3.6@105.929,59.943 J3.6@112.529,59.943 J4.0 J4.6 J4.7 J4.8 J4.9 J5.0 J5.1 J5.3 J5.5 J6.0 P18.7 P18.8 P19.7 P19.8 P19.9 P21.0 P22.0 P23.0 P25.7 P25.8 P25.11 P25.13 SW8.1 U1. U1.A1 U1.A31 U1.AG31 U1.AL1 U1.AL31 U1.D2 U1.F2 U1.K2 U1.T2 U2. U2.A1 U2.A17 U2.A21 U2.A31 U2.AB2 U2.AD2 U2.AE1 U2.AE31 U2.AF2 U2.AG31 U2.AH2 U2.AJ1 U2.AK2 U2.AK4 U2.AK6 U2.AK8 U2.AK10 U2.AK12 U2.AK14 U2.AK16 U2.AK18 U2.AK20 U2.AL1 U2.AL31 U2.B10 U2.B14 U2.D2 U2.F2 U2.J1 U2.K2 U2.M2 U2.P2 U2.R31 U2.T2 U2.V2 U2.Y2 U3.1 U3.9 U3.13 U5.1 U5.5 U5.9 U5.13 U6.7 U6.11 U10.5 U25.1 U25.9 U25.13

## Polygon pours and split planes (outlines as drawn)
VDD on Mid-Layer 2 "Mid_Layer_2-VDD" (solid, remove dead copper, pour order 17): 0,1.016 0,24.12 cw(c0.635,24.12) 0.635,24.755 0.889,24.755 ccw(c0.889,25.39) 1.524,25.39 1.524,38.11 ccw(c0.889,38.11) 0.889,38.745 0.635,38.745 cw(c0.635,39.38) 0,39.38 0,62.484 cw(c1.016,62.484) 1.016,63.5 101.599,63.5 cw(c101.599,62.865) 102.234,62.865 102.234,62.611 ccw(c102.869,62.611) 102.869,61.976 115.589,61.976 ccw(c115.589,62.611) 116.224,62.611 116.224,62.865 cw(c116.859,62.865) 116.859,63.5 132.969,63.5 cw(c132.969,62.484) 133.985,62.484 133.985,45.466 136.525,42.926 136.525,10.16 133.985,7.62 133.985,1.016 cw(c132.969,1.016) 132.969,0 97.36,0 82.099,0 1.016,0 cw(c1.016,1.016)
VDD_IMCU on Mid-Layer 2 "Mid_Layer_2-VDD_SAM" (solid, remove dead copper, pour order 8): 33.503,36.297 33.503,21.234 53.873,21.234 53.873,36.297
GND on Mid-Layer 1 "Mid_Layer_1-GND" (solid, remove dead copper, pour order 16): 0,1.016 0,24.12 cw(c0.635,24.12) 0.635,24.755 0.889,24.755 ccw(c0.889,25.39) 1.524,25.39 1.524,38.11 ccw(c0.889,38.11) 0.889,38.745 0.635,38.745 cw(c0.635,39.38) 0,39.38 0,62.484 cw(c1.016,62.484) 1.016,63.5 101.599,63.5 cw(c101.599,62.865) 102.234,62.865 102.234,62.611 ccw(c102.869,62.611) 102.869,61.976 115.589,61.976 ccw(c115.589,62.611) 116.224,62.611 116.224,62.865 cw(c116.859,62.865) 116.859,63.5 132.969,63.5 cw(c132.969,62.484) 133.985,62.484 133.985,45.466 136.525,42.926 136.525,10.16 133.985,7.62 133.985,1.016 cw(c132.969,1.016) 132.969,0 97.36,0 82.099,0 1.016,0 cw(c1.016,1.016)
GND on Bottom Layer "Bottom_Layer-GND" (solid, remove dead copper, pour order 18): 0,1.016 0,24.12 cw(c0.635,24.12) 0.635,24.755 0.889,24.755 ccw(c0.889,25.39) 1.524,25.39 1.524,38.11 ccw(c0.889,38.11) 0.889,38.745 0.635,38.745 cw(c0.635,39.38) 0,39.38 0,62.484 cw(c1.016,62.484) 1.016,63.5 101.599,63.5 cw(c101.599,62.865) 102.234,62.865 102.234,62.611 ccw(c102.869,62.611) 102.869,61.976 115.589,61.976 ccw(c115.589,62.611) 116.224,62.611 116.224,62.865 cw(c116.859,62.865) 116.859,63.5 132.969,63.5 cw(c132.969,62.484) 133.985,62.484 133.985,45.466 136.525,42.926 136.525,10.16 133.985,7.62 133.985,1.016 cw(c132.969,1.016) 132.969,0 97.36,0 82.099,0 1.016,0 cw(c1.016,1.016)
GND on Top Layer "Top Layer-GND" (solid, remove dead copper, pour order 19): 0,1.016 0,24.12 cw(c0.635,24.12) 0.635,24.755 0.889,24.755 ccw(c0.889,25.39) 1.524,25.39 1.524,38.11 ccw(c0.889,38.11) 0.889,38.745 0.635,38.745 cw(c0.635,39.38) 0,39.38 0,62.484 cw(c1.016,62.484) 1.016,63.5 101.599,63.5 cw(c101.599,62.865) 102.234,62.865 102.234,62.611 ccw(c102.869,62.611) 102.869,61.976 115.589,61.976 ccw(c115.589,62.611) 116.224,62.611 116.224,62.865 cw(c116.859,62.865) 116.859,63.5 132.969,63.5 cw(c132.969,62.484) 133.985,62.484 133.985,45.466 136.525,42.926 136.525,10.16 133.985,7.62 133.985,1.016 cw(c132.969,1.016) 132.969,0 97.36,0 82.099,0 1.016,0 cw(c1.016,1.016)

## Keep-outs
Keep-Out Layer:
  circle w0.1: c133.985,50.892 r0.3
  circle w0.1: c133.985,49.792 r0.3
  circle w0.1: c133.985,48.692 r0.3
  circle w0.1: c136.525,13.909 r0.3
  circle w0.1: c136.525,12.809 r0.3
  circle w0.1: c136.525,11.709 r0.3
  circle w0.1: c0,13.909 r0.3
  circle w0.1: c0,12.809 r0.3
  circle w0.1: c0,11.709 r0.3
  circle w0.152: c13.97,7.62 r2.4
  circle w0.152: c66.04,12.7 r2.4
  circle w0.152: c128.27,46.355 r2.4
  circle w0.152: c15.24,55.88 r2.4
  circle w0.152: c66.04,40.64 r2.4
  circle w0.152: c96.52,7.62 r2.4
  circle w0.1: c13.967,0 r0.3
  circle w0.1: c15.067,0 r0.3
  circle w0.1: c16.167,0 r0.3
  circle w0.1: c123.987,0 r0.3
  circle w0.1: c122.887,0 r0.3
  circle w0.1: c121.787,0 r0.3
  circle w0.1: c121.787,63.5 r0.3
  circle w0.1: c122.887,63.5 r0.3
  circle w0.1: c123.987,63.5 r0.3
  circle w0.1: c13.967,63.5 r0.3
  circle w0.1: c15.067,63.5 r0.3
  circle w0.1: c16.167,63.5 r0.3
  circle w0.1: c0,48.692 r0.3
  circle w0.1: c0,49.792 r0.3
  circle w0.1: c0,50.891 r0.3
  lines w0.152: 90.89,53.591 cw(c90.17,55.88) 91.893,54.209
  lines w0.254: 1.524,25.39 cw(c0.889,25.39) 0.889,24.755 0.635,24.755 ccw(c0.635,24.12) 0,24.12 0,1.016 ccw(c1.016,1.016) 1.016,0 97.409,0 ; 1.524,25.391 1.524,38.11 ccw(c0.889,38.11) 0.889,38.745 0.635,38.745 cw(c0.635,39.38) 0,39.38 0,62.484 cw(c1.016,62.484) 1.016,63.5 101.599,63.5 cw(c101.599,62.865) 102.234,62.865 102.234,62.611 ccw(c102.869,62.611) 102.869,61.976 ; 97.36,0 132.969,0 ccw(c132.969,1.016) 133.985,1.016 133.985,7.62 136.525,10.16 136.525,42.926 133.985,45.466 133.985,62.484 ccw(c132.969,62.484) 132.969,63.5 116.859,63.5 ccw(c116.859,62.865) 116.224,62.865 116.224,62.611 cw(c115.589,62.611) 115.589,61.976 102.87,61.976

## Other copper
Top Layer:
  rectangle net ANT: 134.92,20.343 136.19,21.105
  rectangle net GND: 8.484,25.527 12.167,26.594
  rectangle net GND: 11.557,24.308 13.132,28.397
  pour cut-out: 61.011,27.584 62.001,27.584 cw(c61.94,27.523) 62.027,27.523 62.027,27.407
  pour cut-out: 84.455,53.061 84.785,53.061 84.785,53.137 84.811,53.162
  pour cut-out: 87.401,18.517 86.741,18.517 86.893,18.669
  pour cut-out: 129.108,57.683 130.048,57.683 130.048,57.582 129.108,57.582
  pour cut-out: 121.945,43.129 121.945,39.395 124.46,39.395 124.46,43.129
  pour cut-out: 95.479,47.498 94.869,47.498 94.869,47.701
  pour cut-out: 95.529,54.102 94.92,54.102 94.92,54.051 94.996,53.975
  pour cut-out: 120.142,39.268 120.701,39.268 120.701,38.71 120.142,38.71
  pour cut-out: 98.933,12.573 99.365,12.573 99.543,12.751
  pour cut-out: 69.85,52.502 70.866,52.502 71.095,52.273
  pour cut-out: 2.567,24.813 2.565,24.816 1.626,24.816 1.626,25.019
  pour cut-out: 87.026,54.303 87.049,54.28 88.087,54.28 88.087,54.051 88.113,54.026
  pour cut-out: 11.252,43.635 9.982,43.635 9.982,42.365 11.252,42.365
  pour cut-out: 60.528,30.937 68.073,30.937 68.071,32.715 60.528,32.715
  pour cut-out: 1.371,28.204 4.424,28.204 4.418,35.281 1.372,35.281
  pour cut-out: 28.981,25.603 28.981,26.873 27.711,26.873 27.711,25.603
  pour cut-out: 22.149,1.168 22.149,2.438 20.879,2.438 20.879,1.168
  pour cut-out: 20.447,5.715 20.447,6.985 19.177,6.985 19.177,5.715
  pour cut-out: 20.218,1.143 20.218,3.264 18.948,3.264 18.948,1.143
Mid-Layer 1:
  pour cut-out: 83.346,35.555 cw(c81.567,35.555) 82.825,34.297 82.66,34.132
  pour cut-out: 103.276,41.871 103.276,37.871 106.934,37.871 106.934,41.871
  pour cut-out: 80.086,31.115 80.086,30.582 80.416,30.582
  pour cut-out: 83.316,20.732 81.005,20.732 81.005,23.106 83.316,23.106
  pour cut-out: 79.329,17.386 79.329,19.698 81.703,19.698 81.703,17.386
  pour cut-out: 84.353,16.942 84.353,20.523 85.954,20.523 85.954,16.942
  pour cut-out: 78.613,8.026 76.886,8.026 76.886,9.525 78.613,9.525
  pour cut-out: 91.592,24.666 91.592,24.105 97.765,24.105 97.765,24.689
  pour cut-out: 103.784,51.054 103.784,50.343 103.759,50.317 103.708,50.317
  pour cut-out: 115.468,46.025 116.053,46.025 116.053,45.974 116.027,45.949
  pour cut-out: 75.59,15.113 75.59,16.739 77.419,16.739 77.419,15.113
  pour cut-out: 77.343,16.434 77.343,21.742 79.248,21.742 79.248,16.434
  pour cut-out: 69.939,16.751 69.939,20.891 72.314,20.892 72.314,16.751
  pour cut-out: 66.993,20.815 66.993,23.127 69.367,23.127 69.367,20.815
  pour cut-out: 65.266,17.386 65.266,19.698 67.64,19.698 67.64,17.386
  pour cut-out: 63.107,16.751 63.107,20.917 65.481,20.917 65.481,16.751
  pour cut-out: 58.001,17.386 58.001,19.698 60.376,19.698 60.376,17.386
  pour cut-out: 59.957,20.79 59.957,23.101 62.332,23.101 62.332,20.79
  pour cut-out: 111.579,18.796 107.239,18.796 107.239,20.371 111.579,20.371
  pour cut-out: 28.315,29.007 28.315,31.318 30.429,31.318 30.429,29.007
  pour cut-out: 95.174,4.724 95.174,2.756 93.32,2.756 93.32,4.724
  pour cut-out: 49.613,39.395 49.613,41.707 51.987,41.707 51.987,39.395
  pour cut-out: 106.902,45.949 106.902,43.637 104.528,43.637 104.528,45.949
  pour cut-out: 111.735,24.613 111.735,19.886 108.788,19.886 108.788,24.613
  pour cut-out: 123.165,23.343 123.165,18.872 120.117,18.872 120.117,23.343
  pour cut-out: 15.45,11.278 15.45,16.104 17.824,16.104 17.824,11.278
  pour cut-out: 23.4,15.494 23.4,17.805 25.774,17.805 25.774,15.494
  pour cut-out: 65.303,26.695 65.303,28.245 68.021,28.245 68.021,26.695
  pour cut-out: 122.44,59.068 122.44,51.486 120.066,51.486 120.066,59.068
  pour cut-out: 7.449,59.969 7.449,63.449 9.823,63.449 9.823,59.969
  pour cut-out: 28.448,14.884 28.448,17.196 31.747,17.196 31.747,14.884
  pour cut-out: 13.678,49.898 13.678,52.21 16.053,52.21 16.053,49.898
  pour cut-out: 13.704,41.87 13.704,44.181 16.078,44.181 16.078,41.87
  pour cut-out: 47.232,9.614 47.232,11.925 49.606,11.925 49.606,9.614
  pour cut-out: 24.181,5.486 24.181,7.798 25.705,7.798 25.705,5.486
  pour cut-out: 83.496,40.386 83.496,44.018 85.871,44.018 85.871,40.386
  pour cut-out: 131.445,36.337 119.918,36.337 119.918,40.443 131.445,40.443
Mid-Layer 2:
  pour cut-out: 19.05,38.13 19.05,39.802 19.431,39.802 19.588,39.645
  pour cut-out: 117.602,47.371 117.602,46.914 117.399,46.914 117.373,46.939
  pour cut-out: 131.445,36.337 119.918,36.337 119.918,40.443 131.445,40.443
Multi-Layer:
  pour cut-out: 129.893,-1.295 136.759,-1.295 136.721,45.39 129.898,45.39

## Silkscreen, mask and mechanical layers (free items; w line width, h text height)
Top Overlay:
  drawing of 83 lines, arcs and shapes, not listed
  text "GND" at 12.878,61.697 h1.78
  text "GND" at 89.814,61.671 h1.78
  text ".PCBNumber" at 117.019,61.468 h2.03
  text ".PCBRevision" at 117.084,60.165 h1.52
  text "GND" at 123.698,58.42 h1.78
  text "Debug in" at 101.219,56.032 h2.03 r90
  text "LED1" at 123.342,55.118 h2.03
  text "LED2" at 128.422,55.118 h2.03
  text "nRF USB" at 105.74,55.016 h2.29
  text "Debug out" at 0.406,54.127 h2.03
  text "P0.11" at 87.757,52.781 h1.78
  text "P0.12" at 99.568,52.781 h1.78
  text "LED3" at 123.342,51.664 h2.03
  text "LED4" at 128.422,51.664 h2.03
  text "VDD_HV" at 1.016,50.775 h1.4
  text "P0.13" at 87.757,50.244 h1.78
  text "P0.14" at 99.568,50.244 h1.78
  text "P1.03" at 19.304,49.886 h1.78 r90
  text "P1.02" at 21.844,49.886 h1.78 r90
  text "P0.27" at 24.384,49.886 h1.78 r90
  text "GND" at 26.924,49.886 h1.78 r90
  text "P1.15" at 29.464,49.886 h1.78 r90
  text "P1.14" at 32.004,49.886 h1.78 r90
  text "P1.13" at 34.544,49.886 h1.78 r90
  text "P1.12" at 37.084,49.886 h1.78 r90
  text "P1.11" at 39.624,49.886 h1.78 r90
  text "P1.10" at 42.164,49.886 h1.78 r90
  text "P1.09" at 46.228,49.886 h1.78 r90
  text "P1.08" at 48.768,49.886 h1.78 r90
  text "P1.07" at 51.308,49.886 h1.78 r90
  text "P1.06" at 53.848,49.886 h1.78 r90
  text "P1.05" at 56.388,49.886 h1.78 r90
  text "P1.04" at 58.928,49.886 h1.78 r90
  text "P1.01" at 61.468,49.886 h1.78 r90
  text "P0.10" at 69.088,49.886 h1.78 r90
  text "P0.09" at 71.628,49.886 h1.78 r90
  text "P0.08" at 74.168,49.886 h1.78 r90
  text "P0.07" at 76.708,49.886 h1.78 r90
  text "P0.03" at 79.248,49.886 h1.78 r90
  text "P0.02" at 81.788,49.886 h1.78 r90
  text "P0.01" at 84.328,49.886 h1.78 r90
  text "P0.00" at 86.868,49.886 h1.78 r90
  text "P0.15" at 87.757,47.706 h1.78
  text "P0.16" at 99.568,47.706 h1.78
  text "nRF current" at 0.965,47.193 h2.03
  text "measurement" at 0.483,45.898 h2.03
  text "P0.17" at 87.757,45.169 h1.78
  text "P0.18" at 99.568,45.169 h1.78
  text "P0.19" at 87.757,42.631 h1.78
  text "P0.20" at 99.568,42.631 h1.78
  text "VDD" at 1.016,42.57 h1.4
  text "ID" at 50.317,41.885 h1.4 r90
  text "GPIO" at 104.953,41.377 h1.52 r90
  text "XTAL" at 106.35,41.377 h1.52 r90
  text "VTG" at 24.308,41.056 h1.4 r90
  text "VIO / REF" at 47.727,41.041 h1.4 r90
  text "VDD / nRF" at 19.761,40.98 h1.4 r90
  text "VDD / nRF'" at 22.301,40.98 h1.4 r90
  text "(ARDUINO D0) P1.00" at 64.059,40.777 h1.78 r90
  text "SWD / IO" at 27.508,40.752 h1.4 r90
  text "SWD / CLK" at 30.048,40.752 h1.4 r90
  text "SWO" at 31.928,40.74 h1.4 r90
  text "TRACE" at 76.505,40.183 h1.78
  text "P0.21" at 87.757,40.094 h1.78
  text "P0.22" at 99.568,40.094 h1.78
  text "VIN / 3-5V" at 40.081,39.993 h1.4 r90
  text "RESET" at 34.519,39.811 h1.4 r90
  text "VDD / nRF_HV" at 42.621,39.028 h1.4 r90
  text "VDD / nRF_HV'" at 45.161,39.028 h1.4 r90
  text "GND / DETECT" at 37.617,38.963 h1.4 r90
  text "P0.23" at 87.757,37.556 h1.78
  text "P0.24" at 99.568,37.556 h1.78
  text "P1.14" at 57.767,35.082 h1.52
  text "5V" at 69.248,35.031 h1.52
  text "P0.28" at 87.757,35.019 h1.78
  text "P0.29" at 99.568,35.019 h1.78
  text "Li-Po   VDD   USB" at 18.313,34.95 h1.78
  text "nRF POWER SOURCE" at 16.053,33.299 h2.03
  text "P1.13" at 69.248,32.567 h1.52
  text "P1.15" at 57.717,32.542 h1.52
  text "P0.30" at 87.757,32.482 h1.78
  text "P0.31" at 99.568,32.482 h1.78
  text "DETECT" at 69.16,30.074 h1.52
  text "RESET" at 56.955,30.002 h1.52
  text "GND" at 87.757,29.944 h1.78
  text "GND" at 99.568,29.925 h1.78
  text "SB10-12" at 111.557,24.359 h1.52 r90
  text "SB20-22" at 110.236,24.308 h1.52 r90
  text "SB13-15" at 121.615,23.165 h1.52 r90
  text "SB23-25" at 122.961,23.089 h1.52 r90
  text "External supply" at 0.279,22.454 h2.03
  text "FLOW / CONTROL" at 48.641,22.327 h1.78
  text "-" at 13.741,19.939 h1.52
  text "VCOM0" at 44.907,19.71 h1.78
  text "VCOM2" at 44.907,18.059 h1.78
  text "+" at 13.741,17.399 h1.52
  text "Button 1" at 107.547,17.17 h2.29
  text "Button 2" at 117.771,17.17 h2.29
  text "ON" at 50.038,15.164 h1.78
  text "OFF" at 52.73,15.164 h1.78
  text "Li-po" at 3.251,15.088 h2.03
  text "-" at 5.715,13.513 h1.02
  text "+" at 5.715,10.973 h1.02
  text "N.C." at 46.253,10.465 h1.78 r90
  text "VDD" at 28.365,10.462 h1.78 r90
  text "VDD" at 30.905,10.462 h1.78 r90
  text "RESET" at 33.445,10.462 h1.78 r90
  text "VDD" at 35.985,10.462 h1.78 r90
  text "5V" at 38.525,10.462 h1.78 r90
  text "GND" at 41.065,10.462 h1.78 r90
  text "GND" at 43.605,10.462 h1.78 r90
  text "P0.04 / (A0)" at 52.146,10.462 h1.78 r90
  text "P0.05" at 53.765,10.462 h1.78 r90
  text "P0.06" at 56.305,10.462 h1.78 r90
  text "P0.07" at 58.845,10.462 h1.78 r90
  text "P0.25" at 61.385,10.462 h1.78 r90
  text "P0.26" at 63.925,10.462 h1.78 r90
  text "NFC" at 101.244,10.135 h2.29
  text "RESET" at 71.374,8.204 h2.03
  text "Button 3" at 107.547,7.695 h2.29
  text "Button 4" at 117.771,7.695 h2.29
  text "VEXT   nRF" at 16.662,6.807 h2.03
  text "POWER" at 11.506,2.667 h2.03 r90
  text "GND" at 65.71,1.956 h1.78
  text "For evaluation only; / not FCC approved for resale." at 130.2,1.118 h1.52 r90
  text "nRF5340-DK" at 132.309,1.118 h2.54 r90
  text "GND" at 96.545,0.686 h1.78
  text "nRF ONLY" at 82.448,0.635 h1.78
  text "DEFAULT" at 89.23,0.635 h1.78
  text "ON" at 2.911,0.229 h1.78
  text "OFF" at 5.655,0.229 h1.78
  text "OFF" at 18.009,0.203 h1.78
  text "ON" at 21.438,0.203 h1.78